# Altium PCB PCB1.PcbDoc
Units mil, origin at the board's own origin, x right, y up, seen from the top; angles counter-clockwise.
Board outline 1440 x 920 mil, 2 copper layers (Top Layer, Bottom Layer); 18 components, 18 nets, 62 pads, 9 vias.
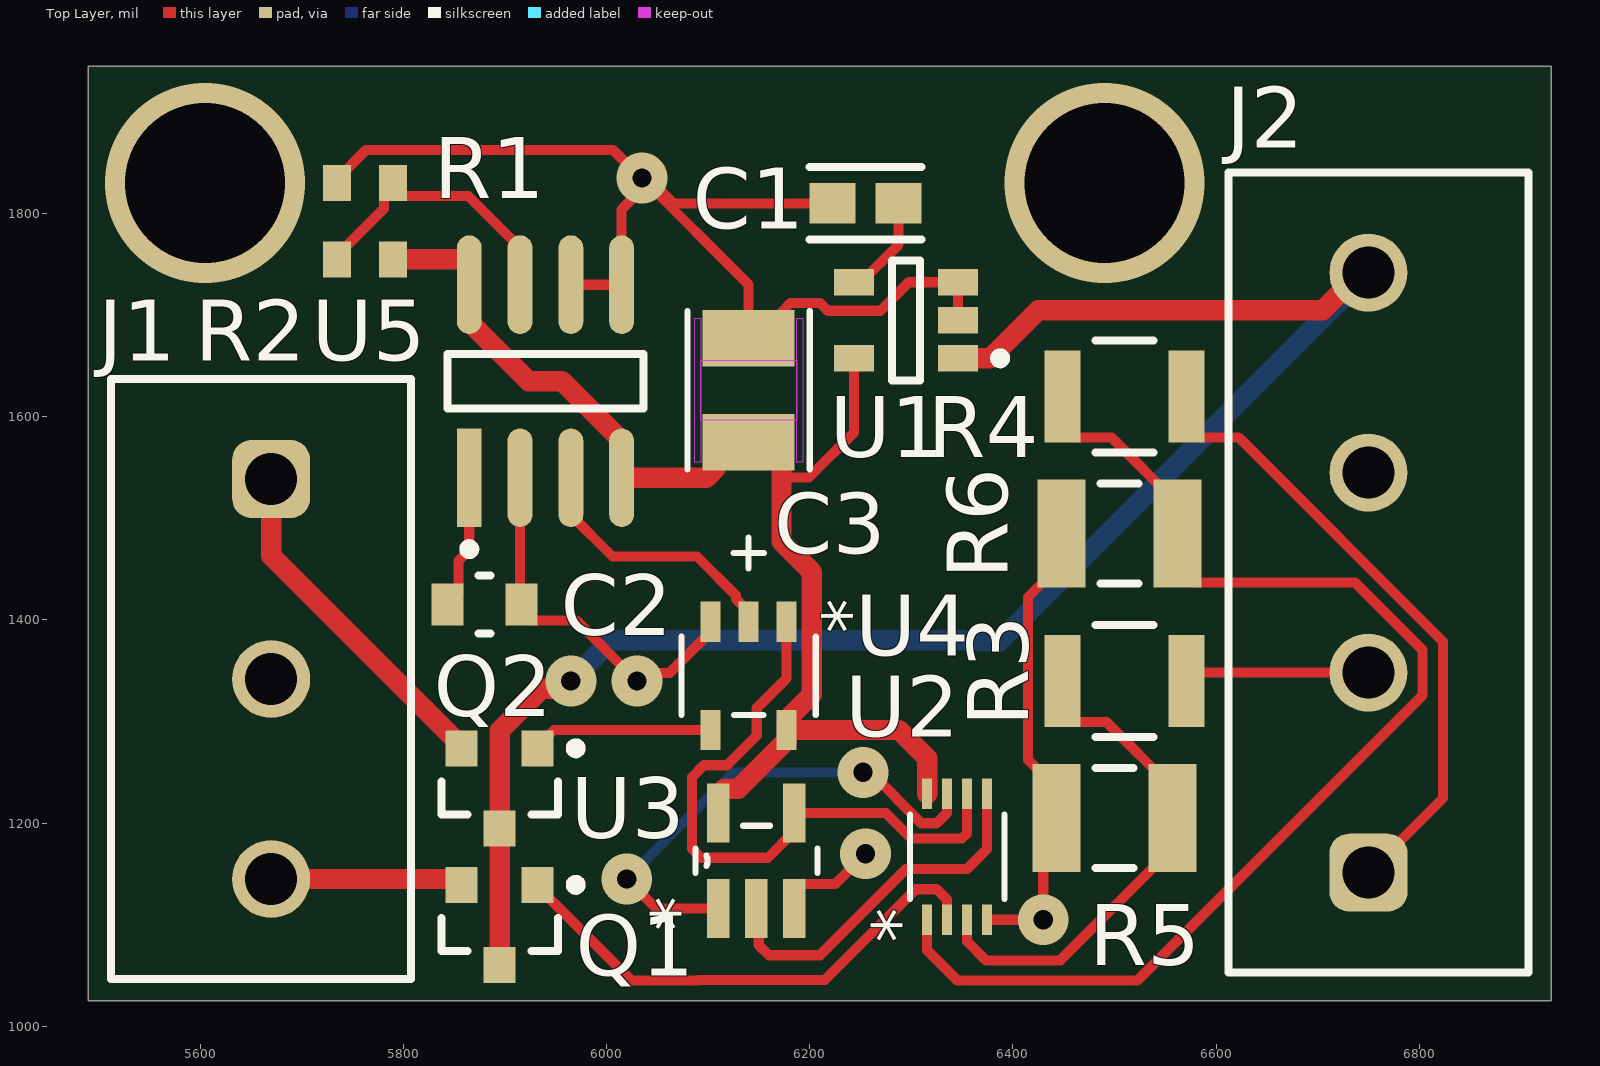
[diagram p0: Top Layer view]
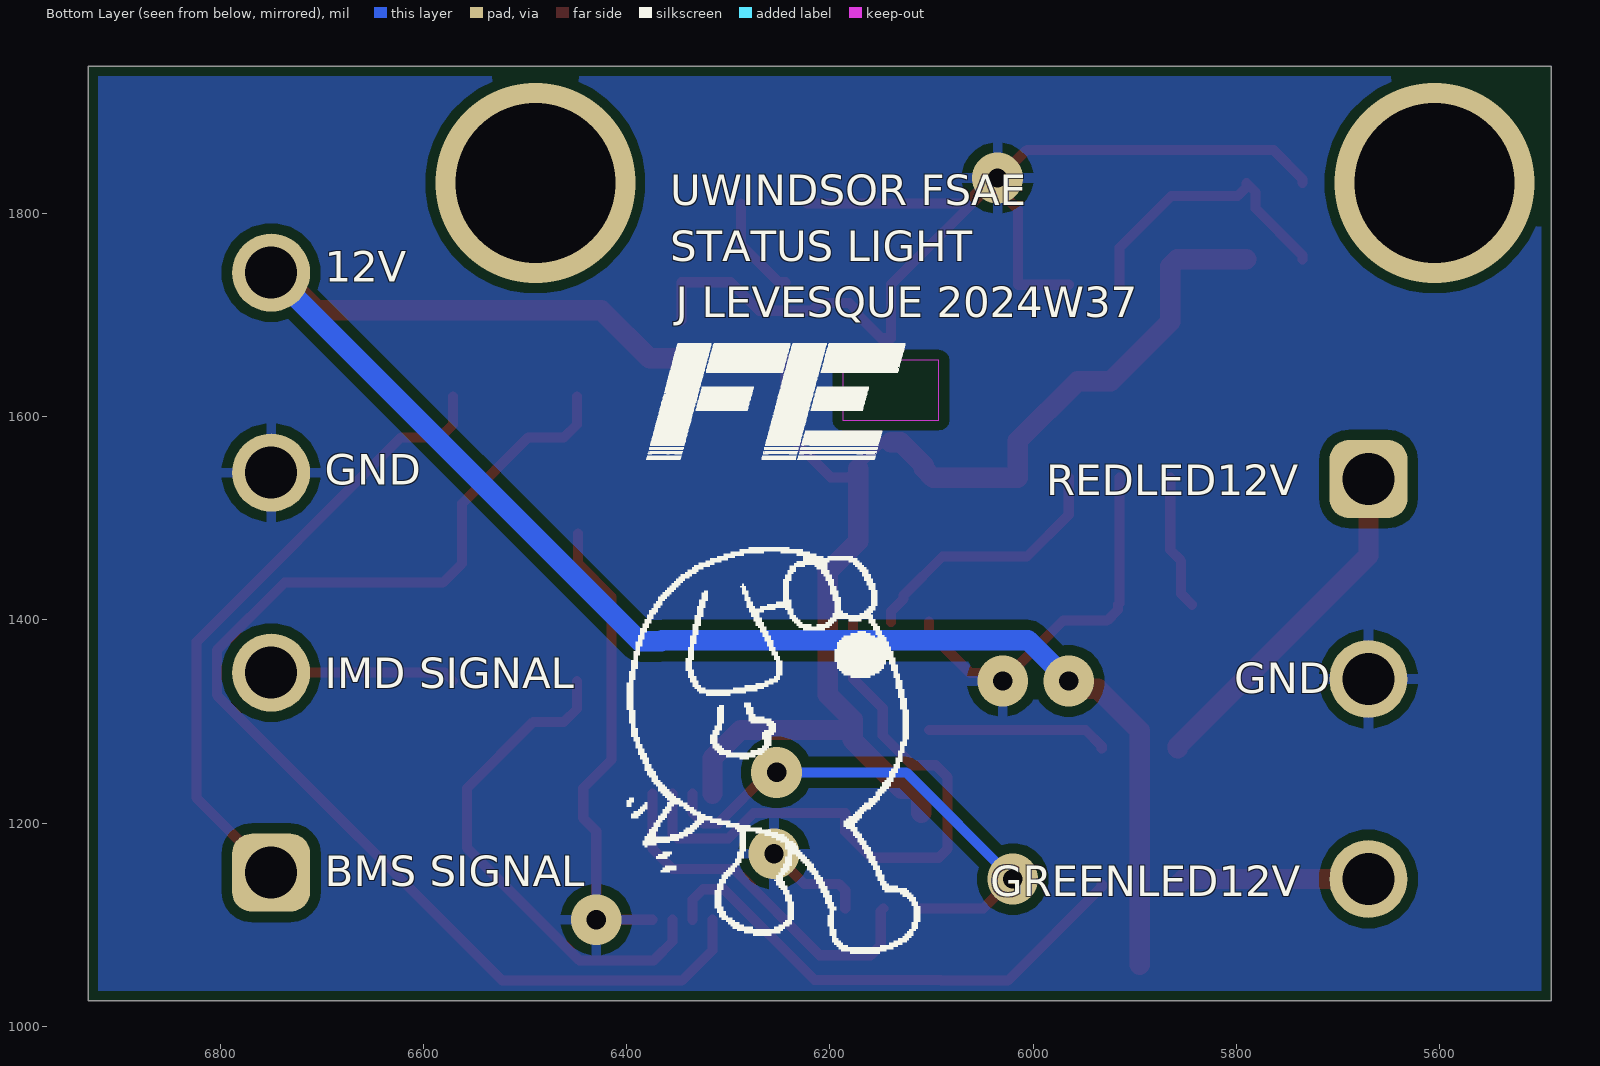
[diagram p1: Bottom Layer view, seen from below]
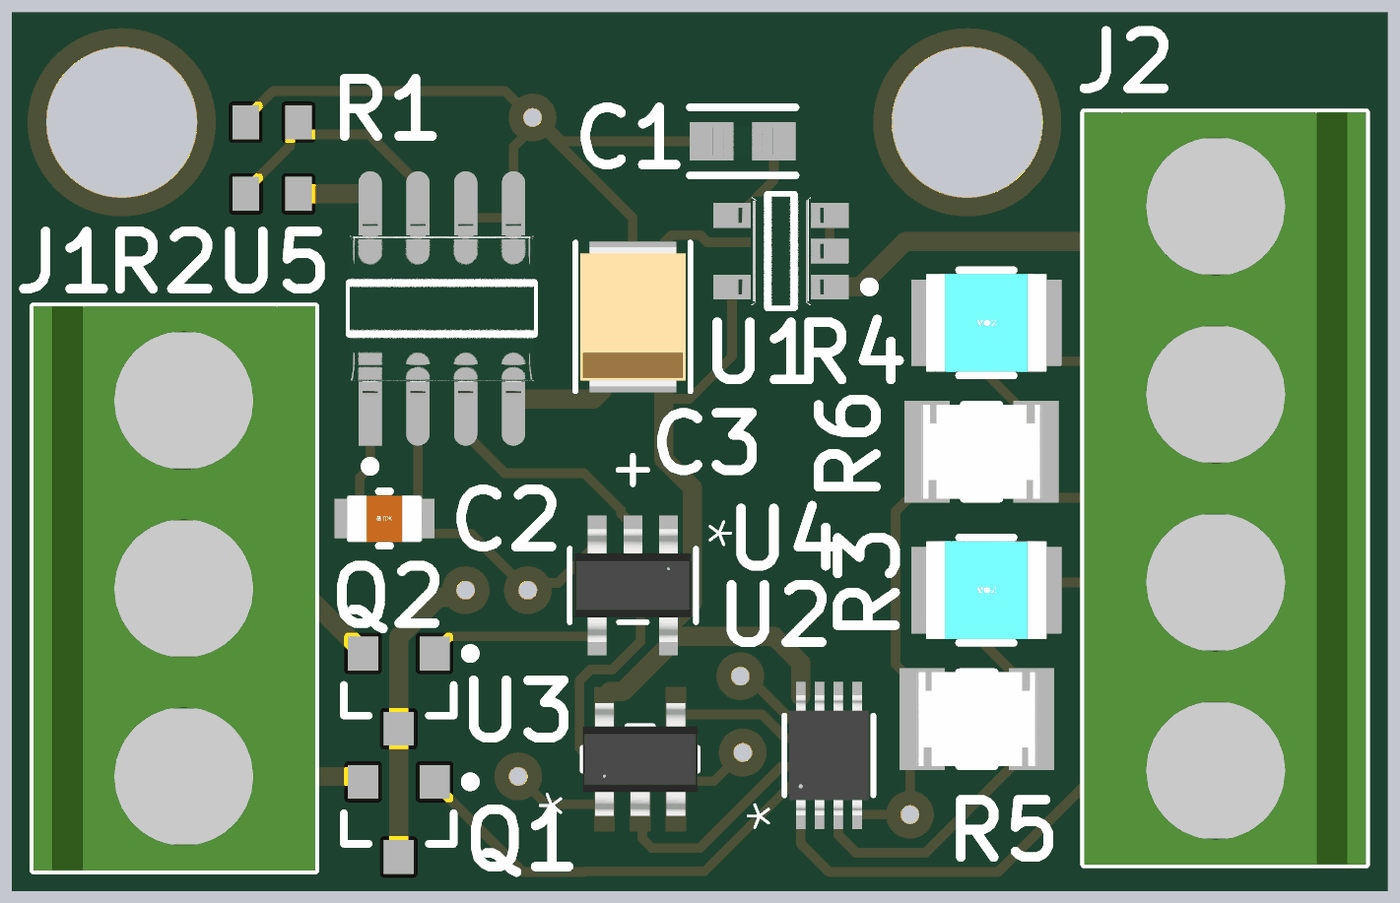
[diagram p2: 3D render of the assembled board from above, using the file's embedded part models]

## Layer stack, top to bottom
Top Solder: solder mask 0.4, Solder Resist, Dk 3.5
Top Layer: signal copper 1.4
Dielectric 1: dielectric 12.6, FR-4, Dk 4.8
Bottom Layer: signal copper 1.4
Bottom Solder: solder mask 0.4, Solder Resist, Dk 3.5

## Board outline
5490,1025 5490,1945 6930,1945 6930,1025

## Design rules (kind name [scope] priority, off if disabled: settings)
Clearance [All] p1: gap=10 ignorepadtopadclearanceinfootprint=FALSE
PolygonConnect [All] p1: connectstyle=Relief reliefconductorwidth=10 reliefentries=4 polygonreliefangle="90 Angle" airgapwidth=10
RoutingVias [All] p1: holewidth=28 width=50 viastyle="Through Hole" minholewidth=28 minwidth=50 maxholewidth=28 maxwidth=50
SolderMaskExpansion [All] p1: expansion=4 istentingtop=FALSE
SupplyNets "Schematic Supply Nets_2" [InNet('GND')] p1: voltage=0.000
SupplyNets "Schematic Supply Nets_1" [InNet('12V')] p2: voltage=0.000
SupplyNets "Schematic Supply Nets" [InNet('5V')] p3: voltage=0.000
Width [All] p1: maxlimit=10 minlimit=10 preferedwidth=10
30 further rules are at their usual default settings.

## Components (designator, comment, footprint, x,y, rotation, side; value= is the part's Value field where it differs from the comment)
C1 "CL10C471JB8NNNC" FP-CL10-IPC_A 6255,1810 r180 top
C2 "C2012X5R1E106M125AB" FP-C2012-125-0_2-MFG 5880,1415 r0 top
C3 "T598B225M035ATE150" CAPMP3.7X2.8_2.1N_KEM 6140,1626.17 r90 top
J1 "691137710003" 691137710003 5660.16,1341.85 r270 top
J2 "691137710004" 691137710004 6759.84,1446.57 r90 top
Q1 "NTR4170NT1G" ONSC-SOT-23-3-318-08_V 5895,1100 r270 top
Q2 "NTR4170NT1G" ONSC-SOT-23-3-318-08_V 5895,1234.37 r270 top
R1 "RC0603FR-0724KL" RESC1608X55X25NL10T15 5762.44,1830 r180 top
R2 "RC0603FR-0724KL" RESC1608X55X25NL10T15 5762.56,1755 r180 top
R3 "RK73H2ETTD2050F" FP-RK73H2E-MFG 6510,1340 r180 top
R4 "RK73H2ETTD2050F" FP-RK73H2E-MFG 6510,1620 r180 top
R5 "CRCW1210147RFKEA" FP-CRCW1210-e3-IPC_B 6500,1205 r180 top
R6 "CRCW1210147RFKEA" FP-CRCW1210-e3-IPC_B 6505,1485 r180 top
U1 "MIC5219-5.0YM5-TR" FP-SOT23-5LD-PL-1-MFG 6295,1695 r180 top
U2 "SN74LVC3G14DCUR" DCU8_TEX 6345.16,1167 r90 top
U3 "SN74AHC1G32DBVR" DBV5 6147.6,1163 r90 top
U4 "74AHCT1G08W5-7" SOT25_DIO 6140,1345 r270 top
U5 "NE555DR" FP-D0008A-IPC_A 5940,1635 r90 top

## Footprints (in the part's own frame and the unit in brackets; to place one, negate y for a bottom-side part, rotate by r counter-clockwise, add the part's x,y. Pads: shape width x height; smd on the part's side, far side on the other; paste and mask are expansions set on the pad)
691137710003 [mm] "Horizontal Cable Entry with Pressure Clamp, pitch 5mm, 03p"
  rrect50% 1.95x1.95 hole 1.3: 1(-5,0.25)
  round 1.95 hole 1.3: 2(0,0.25) 3(5,0.25)
  silkscreen extent -7.5,-3.75 7.5,3.75, body extent -7.5,-3.75 7.5,3.75, height 11.6
691137710004 [mm] "Horizontal Cable Entry with Pressure Clamp, pitch 5mm, 04p"
  rrect50% 1.95x1.95 hole 1.3: 1(-7.5,0.25)
  round 1.95 hole 1.3: 2(-2.5,0.25) 3(2.5,0.25) 4(7.5,0.25)
  silkscreen extent -10,-3.75 10,3.75, body extent -10,-3.75 10,3.75, height 11.6
CAPMP3.7X2.8_2.1N_KEM [mm]
  rect 1.405x2.3 smd paste+0 mask+0: 1(-1.3,0) 2(1.3,0)
  Top Layer keep-out region: -0.746,-1.201 -0.746,1.201 0.746,1.201 0.746,-1.201
  Top Layer keep-out region: -1.799,1.201 -1.799,1.349 1.799,1.349 1.799,1.201
  Top Layer keep-out region: -1.799,-1.349 -1.799,-1.201 1.799,-1.201 1.799,-1.349
  Keep-Out Layer region: -0.746,-1.201 -0.746,1.201 0.746,1.201 0.746,-1.201
  silkscreen extent -4.45,-1.53 1.98,1.53, body extent -1.85,-1.4 1.85,1.4, height 2.15
DBV5 [mil]
  rect 58x22 smd paste-29 mask-29: 1(-47,37.4) 2(-47,0) 3(-47,-37.4) 4(47,-37.4) 5(47,37.4)
  silkscreen extent -12,-60 34,60, body extent -59,-60 59,60, height 57
DCU8_TEX [mil]
  rect 30x10 smd paste+0 mask+0: 1(-62,29.53) 2(-62,9.84) 3(-62,-9.84) 4(-62,-29.53) 5(62,-29.53) 6(62,-9.84) 7(62,9.84) 8(62,29.53)
  silkscreen extent -42,-46 42,46, body extent -63,-41 63,41, height 35
FP-C2012-125-0_2-MFG [mm]
  rect 0.8x1.05 smd paste+0 mask+0: 1(-0.925,0) 2(0.925,0)
  silkscreen extent -0.15,-0.72 0.15,0.72, body extent -1.43,-0.82 1.43,0.82, height 0.25
FP-CL10-IPC_A [mil]
  rect 45.6x39.85 smd paste+0 mask+0: 1(-32.56,0) 2(32.56,0)
  silkscreen extent -55,-36 55,36, body extent -75,-40 75,40, height 10
FP-CRCW1210-e3-IPC_B [mil]
  rect 47.44x106.54 smd paste+0 mask+0: 1(-57.11,0) 2(57.11,0)
  silkscreen extent -19,-49 19,49, body extent -91,-63 91,63, height 10
FP-D0008A-IPC_A [mil]
  rect 97.21x24.49 smd paste+0 mask+0: 1(-95.02,75)
  rrect100% 97.21x24.49 smd paste+0 mask+0: 2(-95.02,25) 3(-95.02,-25) 4(-95.02,-75) 5(95.02,-75) 6(95.02,-25) 7(95.02,25) 8(95.02,75)
  silkscreen extent -170,-97 27,97, body extent -163,-116 163,116, height 10
FP-RK73H2E-MFG [mm]
  rect 0.9x2.3 smd paste+0 mask+0: 1(-1.55,0) 2(1.55,0)
  silkscreen extent -0.72,-1.4 0.72,1.4, body extent -2.1,-1.5 2.1,1.5, height 0.25
FP-SOT23-5LD-PL-1-MFG [mm]
  rect 1x0.66 smd paste+0 mask+0: 1(-1.3,0.95) 2(-1.3,0) 3(-1.3,-0.95) 4(1.3,-0.95) 5(1.3,0.95)
  silkscreen extent -2.48,-1.5 0.35,1.5, body extent -1.9,-1.6 1.9,1.6, height 0.25
ONSC-SOT-23-3-318-08_V [mm] "SOT23, 3-Leads, Body 2.92x1.3mm, Pitch 0.95mm"
  rect 0.9x0.8 smd: 1(-1,0.95) 2(-1,-0.95) 3(1,0)
  silkscreen extent -1.12,-1.46 0.65,2.03, body extent -0.65,-1.46 0.65,1.46, height 1.11
RESC1608X55X25NL10T15 [mm] "Chip Resistor, 2-Leads, Body 1.60x0.80mm, IPC Medium Density"
  rect 0.7x0.9 smd: 1(-0.7,0) 2(0.7,0)
  body extent -0.85,-0.45 0.85,0.45, height 0.55
SOT25_DIO [mm]
  rect 1.006x0.5 smd paste+0 mask+0: 1(-1.353,0.95) 2(-1.353,0) 3(-1.353,-0.95) 4(1.353,-0.95) 5(1.353,0.95)
  silkscreen extent -0.98,-1.68 0.98,1.68, body extent -1.5,-1.55 1.5,1.55, height 1.45

## Part data
C1: library part CMP-13271-001951-1, "Cap Ceramic 470pF 50V C0G ±5% Pad SMD 0603 +125°C T/R", Capacitance=470pF, Case Code (Imperial)=0603, Case Code (Metric)=1608, Dielectric=C0G, Max Operating Temperature=125°C, Min Operating Temperature=-55°C, Package Quantity=1, Temperature Coefficient=300ppm/°C, Tolerance=5%, Voltage=50V, Case/Package=0603, Depth=0.8mm, Height=0.8mm, Lead Free="Lead Free", Length=1.6mm, Material=Ceramic, Mount="Surface Mount", Packaging="Tape and Reel", Radiation Hardening=No, Thickness=0.035inch, Voltage Rating=50V, Voltage Rating (DC)=50V, Width=0.031inch
C2: library part CMP-08246-005781-1, "Multilayer Ceramic Capacitors 10μF ±20% 25V X5R SMD 0805", Capacitance=10uF, Case Code (Imperial)=0805, Case Code (Metric)=2012, Dielectric=X5R, Dielectric Material=Ceramic, Max Operating Temperature=85°C, Min Operating Temperature=-55°C, Package Quantity=1, Tolerance=20%, Voltage Rating=25V, Case/Package=0805, Depth=1.25mm, Height=1.25mm, Lead Free="Lead Free", Length=2mm, Mount="Surface Mount", Packaging="Tape and Reel", Resistor Type=Ceramic, RoHS Compliant=Yes, Series=C, Termination=SMD/SMT, Thickness=0.057inch, Voltage Rating (DC)=25V, Weight=0.000194oz, Width=1.2mm
C3: "No Description Available", Mfr_Name=Kemet
J1: library part CMP-002-00076-1, "Series 1377 - 5.00 mm Horizontal Entry with Pressure Clamp WR-TBL, 3 pin", RoHS Compliant=Yes
J2: library part CMP-1502-03326-2, Lead Pitch=5mm, NexarPartId=78871140, Number of Pins=4, Packaging=Box, RoHS=Non-Compliant
Q1 Q2: library part CMP-1058-00736-1, "Power MOSFET, 30 V, 3.1 A, Single N-Channe, 3-Pin SOT-23, Pb-Free, Tape and Reel", Manufacturer="On Semiconductor", Package Type=SOT-23-3, Channel Polarity="N Channel", Ciss Typ (pF)=432, ComponentLink1Description="Manufacturer URL", ComponentLink1URL=http://www.onsemi.com/, ComponentLink2Description=Datasheet, ComponentLink2URL=http://www.onsemi.cn/pub_link/Collateral/NTR4170N-D.PDF, ComponentLink3Description="Package Specification", ComponentLink3URL=http://www.onsemi.cn/pub_link/Collateral/318-08.PDF, Configuration=Single, Coss Typ (pF)=53.6, Crss Typ (pF)=37.1, DatasheetVersion="Rev. 1", Mounting Technology="Surface Mount", PackageDescription="3-Pin Small Outline Transistor, Body 2.92 x 1.3 mm, Pitch 0.95 mm", PackageReference=SOT-23-3-318-08, PackageVersion="Rev. AP, 11/2009", Packing="Tape and Reel", PartNumber=NTR4170NT1G, Qrr Typ (nC)=2.9, RoHS=Pb-Free, V(BR)DSS Min (V)=30, VGS Max (V)=12, VGS(th) Max (V)=1.4
R1 R2: library part CMP-2000-03968-1, Manufacturer=Yageo, Part Number=RC0603FR-0724KL
R3 R4: library part CMP-2005-02687-2, "205Ω ±1% 0.5W Chip Resistor 1210 Thick Film AEC-Q200 Qualified", Case Code (Imperial)=1210, Case Code (Metric)=3225, Max Operating Temperature=155°C, Min Operating Temperature=-55°C, Package Quantity=5000, Power Rating=500mW, Resistance=205R, Resistor Type="Thick Film", Temperature Coefficient=100ppm/°C, Tolerance=1%, Voltage Rating=200V, Case/Package=1210, Construction=Rectangular, Depth=2.6mm, Height=0.6mm, Lead Free="Lead Free", Length=3.2mm, Military Standard=Not, Packaging="Tape and Reel", RoHS Compliant=Yes, Series=RK73H, Termination=SMD/SMT, Width=2.6mm
R5 R6: library part CMP-2005-00392-2, "RES SMD 205K OHM 1% 1/2W 1902", Case Code (Imperial)=1210, Case Code (Metric)=3225, Max Operating Temperature=155°C, Max Power Dissipation=500mW, Min Operating Temperature=-55°C, Package Quantity=5000, Resistance=147R, Temperature Coefficient=100ppm/°C, Tolerance=1%, Voltage Rating=200V, Case/Package=1210, Composition="Thick Film", Contact Plating=Tin, Features="Automotive AEC-Q200", Height=0.024inch, Lead Free="Lead Free", Length=0.126inch, Number of Terminations=2, Packaging="Tape and Reel", Power Rating=500mW, Radiation Hardening=No, Termination=SMD/SMT, Voltage Rating (DC)=200V, Weight=0.000564oz, Width=2.5mm
U1: library part CMP-06324-000019-1, "IC REG LINEAR 5V 500MA SOT23-5", Ambient Temperature Range High=+125°C, Ambient Temperature Range Low=-40°C, Dropout Voltage=350mV, Manufacturer="Microchip Technology", Max Supply Voltage=12V, Min Supply Voltage=2.5V, Nominal Supply Current=80-12000uA, Output Current=500mA, Output Voltage=5V, Package=SOT23-5LD-PL-1, Temperature="-40°C to +125°C", Accuracy Percentage=1%, Automotive=No, Category=IC, ComponentLink2Description=Datasheet, ComponentLink2URL=http://ww1.microchip.com/downloads/en/DeviceDoc/MIC5219-500mA-Peak-Output-LDO-Regulator-DS20006021A.pdf, Device Class L1="Integrated Circuits (ICs)", Device Class L2="Power Management ICs", Device Class L3="Voltage Regulators - Linear", Digikey Description="IC REG LINEAR 5V 500MA SOT23-5", Height=1.45mm, Lead Free=Yes, Manufacturer Part Number=MIC5219-5.0YM5-TR, Max Junction Temp=+125°C, Mouser Description="IC REG LINEAR 5V 500MA SOT23-5", Number of Outputs=1, Octopart=https://octopart.com/mic5219-5.0ym5-tr-microchip-66802269, Output Type=Fixed, RoHS=TRUE, Standoff Height=0mm, Temperature Range High=+125°C, Temperature Range Low=-40°C
U2: "No Description Available", Mfr_Name="Texas Instruments", RefDes=RefDes, Type=Type
U3: "Logic OR gate", Mfr_Name="Texas Instruments", RefDes=RefDes, Type=Type
U4: "No Description Available", Mfr_Name="Diodes Inc", RefDes=RefDes, Type=Type
U5: library part CMP-1685-00007-2, "IC OSC SGL TIMER 100KHZ 8-SOIC", Case/Package=SOIC, Frequency=100kHz, High Level Output Current=-200mA, Low Level Output Current=200mA, Max Operating Temperature=70°C, Max Supply Voltage=16V, Min Operating Temperature=0°C, Min Supply Voltage=4.5V, Operating Supply Current=10mA, Package Quantity=2500, Quiescent Current=15mA, Contact Plating=Gold, Height=1.58mm, Lead Free="Lead Free", Length=4.9mm, Mount="Surface Mount", Number of Pins=8, Number of Timers/Counters=1, Packaging="Tape and Reel", Radiation Hardening=No, REACH SVHC="No SVHC", Weight=0.002561oz, Width=3.91mm

## Via types
v1: diameter 50, hole 19, Top Layer to Bottom Layer, tented both sides, 7 vias
v2: diameter 196.85, hole 157.48, Top Layer to Bottom Layer, tented both sides, 2 vias

## Nets (pads, with @x,y where several pads share a name; then routed paths per layer and width w, separated by ;. In a path a pad name is that pad's centre, name@x,y a point inside that pad or via, vN(x,y) a via of type N, cw(c..) or ccw(c..) an arc to the next point about the centre after c; other vN are vias at no path point)
5V: C3.1 R2.1 U1.5 U2.8 U3.5 U4.5 U5.4 U5.8 | length 1302.1
  Top Layer w10: C3.1 6149.61,1575 6172.28,1552.34 6172.28,1549.12 6181.06,1540.34 6199.33,1540.34 6243.82,1584.82 U1.5
  Top Layer w20: R2.1 5858.31,1755 5865,1748.31 U5.8 5865,1693.66 5923.66,1635 5956.34,1635 6015,1576.34 U5.4 6098.58,1539.98 6107.72,1549.12 6107.72,1552.34 6130.39,1575 C3.1 ; U3.5 6110.2,1228 6116.2,1234 6129.61,1234 6177.4,1281.79 U4.5 ; C3.1@6172.28,1549.12 6172.28,1477.28 6202.24,1447.31 6202.24,1326.54 6177.4,1301.69 U4.5 ; U2.8 6315.63,1264 6287.89,1291.74 U4.5
12V: J2.4 Q1.3 Q2.3 U1.1 | length 1711.6
  Top Layer w20: Q1.3 Q2.3 5895,1291.02 5936.33,1332.35 5957.35,1332.35 v1(5965,1340) ; U1.1 6377.6,1657.6 6425,1705 6705,1705 6741.85,1741.85 J2.4
  Bottom Layer w20: v1(5965,1340) 6005,1380 6365,1380 6365.86,1379.14 6387.29,1379.14 J2.4
5552AND: U4.2 U5.3 | length 262.9
  Top Layer w10: U5.3 5965,1503.62 6006.06,1462.56 6089.15,1462.56 6127.44,1424.27 6127.44,1420.77 6140,1408.21 U4.2
BMS2OR: U2.5 U3.2 | length 363.5
  Top Layer w10: U3.2 6150,1113.6 6150,1080 6160,1070 6210,1070 6295,1155 6355,1155 6374.69,1174.69 U2.5
BMSSIG: J2.1 R4.1 | length 626.2
  Top Layer w10: R4.1 6571.02,1592.44 6583.74,1579.72 6622.21,1579.72 6823.39,1378.55 6823.39,1224.69 J2.1
GND: C1.2 C2.2 C3.2 J1.2 J2.3 R1.2 R5.2 R6.2 U1.2 U1.3 U2.4 U3.3 U4.3 U5.2 U5.5 U5.6 | length 2108.6
  Top Layer w10: R1.2 5734.88,1833.94 5763.66,1862.72 6006.15,1862.72 6033.86,1835 v1(6035,1835) ; U5.2 5915,1416.42 C2.2 5916.42,1410.08 5927.17,1399.33 5970.67,1399.33 v1(6030,1340) 6037.65,1347.65 6061.94,1347.65 6102.6,1388.31 U4.3 ; U5.6 U5.5 6015,1804.18 6035,1824.18 v1(6035,1835) ; U3.3 6185,1134 6191,1140 6225,1140 v1(6255,1170) ; C1.2 6066.57,1810 6041.57,1835 v1(6035,1835) ; U1.2 U1.3 6297.71,1732.4 6269.72,1704.41 6217.92,1704.41 6210.33,1712 6181.06,1712 6172.28,1703.22 6172.28,1700 6149.61,1677.34 C3.2 6140,1730 v1(6035,1835) ; U2.4 v1(6430,1105) 6430,1192.11 R5.2 6442.89,1234.55 6415,1262.44 6415,1422.56 6447.89,1455.45 R6.2
GREENLED12V: J1.3 Q1.2 | length 189.9
  Top Layer w20: J1.3 5851.97,1145 Q1.2
IMD2OR: U2.7 U3.1 | length 512.2
  Top Layer w10: v1(6020,1145) 6049,1116 U3.1 ; v1@6245,1250 v1(6252.5,1250) 6260,1250 6310,1200 6325,1200 6335.31,1210.32 U2.7
  Bottom Layer w10: v1(6020,1145) 6125,1250 v1(6252.5,1250)
IMDSIG: J2.2 R3.1 | length 182.4
  Top Layer w10: R3.1 6579.17,1348.15 J2.2
INVTOGATE: Q1.1 U2.2 | length 504.4
  Top Layer w10: Q1.1 5932.4,1137.4 6024.8,1045 6090,1045 6090.58,1045.58 6215,1045.58 6304.42,1135 6325,1135 6335.31,1124.68 U2.2
NetC1_1: C1.1 U1.4 | length 99.6
  Top Layer w10: U1.4 6250.51,1732.4 6287.56,1769.45 C1.1
NetC2_1: C2.1 U5.1 | length 133.8
  Top Layer w10: C2.1 5854.33,1425.75 5854.33,1458.19 5865,1468.85 U5.1
NetQ2_1: Q2.1 U4.4 | length 178.8
  Top Layer w10: Q2.1 5932.4,1275.71 5948.43,1291.74 U4.4
NetR1_1: R1.1 R2.2 U5.7 | length 287.8
  Top Layer w10: R2.2 5735,1758.94 5781.22,1805.16 5781.22,1821.22 R1.1 5790,1826.06 5798.78,1817.28 5864.1,1817.28 5915,1766.38 U5.7
NetR3_2: R3.2 R5.1 U2.3 | length 504.1
  Top Layer w10: U2.3 6355,1083.47 6373.47,1065 6446.67,1065 6557.11,1175.45 R5.1 6557.11,1234.55 6491.94,1299.72 6461.69,1299.72 6448.98,1312.44 R3.2
NetR4_2: R4.2 R6.1 U2.1 | length 1199.4
  Top Layer w10: U2.1 6315.63,1075 6345.63,1045 6522.35,1045 6803.39,1326.04 6803.39,1370.26 6736.92,1436.73 6580.83,1436.73 6562.11,1455.45 R6.1 6562.11,1514.55 6496.94,1579.72 6461.69,1579.72 6448.98,1592.44 R4.2
OR2INV: U2.6 U3.4 U4.1 | length 630
  Top Layer w10: U4.1 6177.4,1342.59 6148.03,1313.22 6148.03,1286.32 6118.65,1256.94 6095.93,1256.94 6084.2,1245.21 6084.2,1174.79 6092.98,1166 6159,1166 6185,1192 U3.4 6275,1210 6300,1185 6350,1185 6355,1190 U2.6
REDLED12V: J1.1 Q2.2 | length 342.7
  Top Layer w20: J1.1 5670,1463.31 5857.6,1275.71 Q2.2
copper on no net:
  other v2: 5605,1830 6490,1830

## Polygon pours and split planes (outlines as drawn)
GND on Bottom Layer "GND_L02_P000" (solid, pour order 0): 5500,1935 5500,1035 6920,1035 6920,1935

## Silkscreen, mask and mechanical layers (free items; w line width, h text height)
Bottom Overlay:
  drawing of 25 lines, arcs and shapes, not listed
  text "UWINDSOR FSAE" at 6357,1808 h30
  text "STATUS LIGHT" at 6357,1753 h30
  text "12V" at 6697,1733 h30
  text "J LEVESQUE 2024W37" at 6352,1698 h30
  text "GND" at 6697,1533 h30
  text "REDLED12V" at 5987,1523 h30
  text "IMD SIGNAL" at 6697,1333 h30
  text "GND" at 5802,1328 h30
  text "BMS SIGNAL" at 6697,1138 h30
  text "GREENLED12V" at 6042,1128 h30
Top Assembly:
  the board outline again, w10

## Text inside footprints (layer, text, board x,y; h text height)
U2: Top 3D Body "*" at 6356.66,1122.5 h50 r90; Top Overlay "*" at 6310.63,1082.5 h50 r90
U3: Top 3D Body "*" at 6093.2,1093.5 h50 r90; Top Overlay "*" at 6093.2,1093.5 h50 r90
U4: Top 3D Body "*" at 6149.09,1380.96 h50 r270; Top Overlay "*" at 6192.09,1420.76 h50 r270